# EAGLE board ubraidsII (EAGLE 7.5.0)
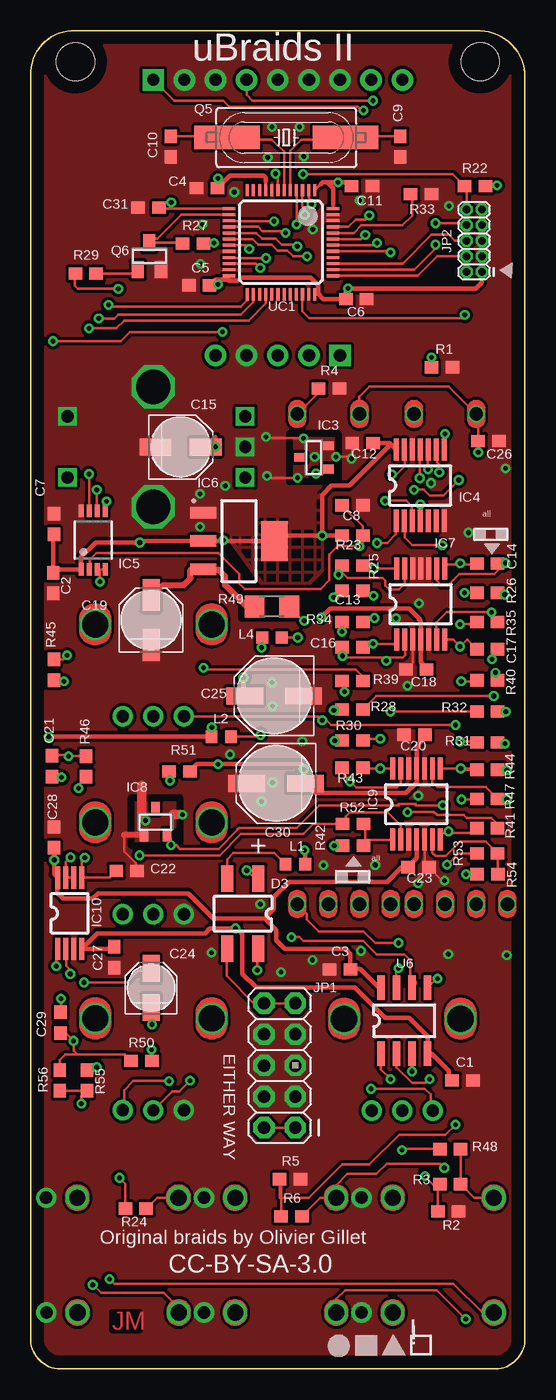
[diagram p0: board, top side]
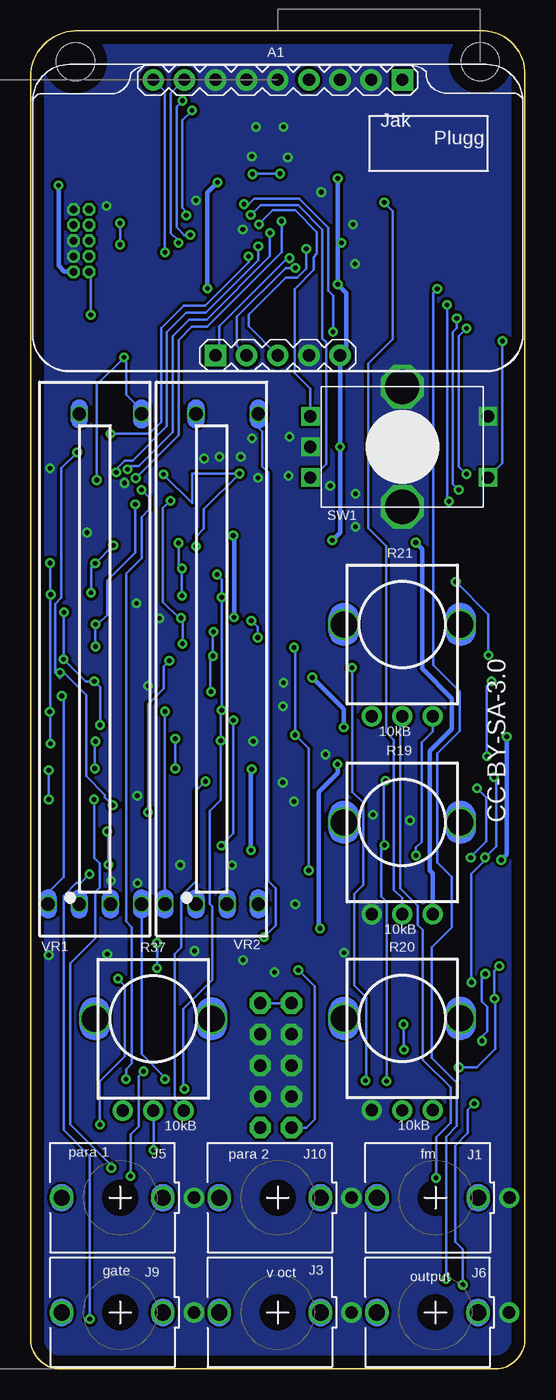
[diagram p1: board, bottom side, seen from below]

Size 40.32 x 109.22 mm. Coordinates in mm from the lower left corner, seen from the top.
Outline: 0,2.54 arc91 2.38,0 37.94,0 arc91 40.32,2.54 40.32,105.41 arc88 36.67,109.22 3.65,109.22 arc94 0,105.57 0,2.54
Copper layers (1*16): Top 0.035mm / dielectric 1.5mm / Bottom 0.035mm
Design rules "default *": minimum track width 10mil, minimum drill 0.61mm, track to track 8mil, track to pad 8mil, pad to pad 8mil, via to via 8mil, smd to smd 8mil, copper to edge 40mil, drill to drill 8mil, minimum pad ring 0mil, minimum via ring 8mil, stop-mask expansion 4mil, vias tented up to drill 15mil, thermal gap 10mil
Net classes: 0 default: width 0.203 mm, drill 0.3 mm, clearance 0.152 mm, clearance 0.152 mm to class 1, clearance 0.152 mm to class 2; 1 hipriority: width 0.203 mm, drill 0.3 mm, clearance 0.152 mm, clearance 0.152 mm to class 0, clearance 0.152 mm to class 2; 2 powa: width 0.381 mm, drill 0.3 mm, clearance 0.152 mm, clearance 0.152 mm to class 0, clearance 0.152 mm to class 1
Holes 3.1 mm at 3.65,106.68 36.67,106.68

## Footprints (pad centres in the part's own frame; a part is rotated, then mirrored left to right if it is on the bottom)
DISPLAY-MODULE = drill 1 pad 1.75 square: 1 14.92,1.25; 6 30.16,23.75 | drill 1 pad 1.75: 2 17.46,1.25; 3 20,1.25; 4 22.54,1.25; 5 25.08,1.25; 7 27.62,23.75; 8 25.08,23.75; 9 22.54,23.75; 10 20,23.75; 11 17.46,23.75; 12 14.92,23.75; 13 12.38,23.75; 14 9.84,23.75
CAP_0603 = smd 1.1 x 1: 1 -0.85,0; 2 0.85,0
CAP_0603_C2 = smd 1.1 x 1: 1 -0.85,0; 2 0.85,0
CAP_0603_C3 = smd 1.1 x 1: 1 -0.85,0; 2 0.85,0
CAP_0603_C4 = smd 1.1 x 1: 1 -0.85,0; 2 0.85,0
CAP_0603_C5 = smd 1.1 x 1: 1 -0.85,0; 2 0.85,0
CAP_0603_C6 = smd 1.1 x 1: 1 -0.85,0; 2 0.85,0
CAP_0603_C7 = smd 1.1 x 1: 1 -0.85,0; 2 0.85,0
CAP_0603_C8 = smd 1.1 x 1: 1 -0.85,0; 2 0.85,0
CAP_0603_C9 = smd 1.1 x 1: 1 -0.85,0; 2 0.85,0
CAP_0603_C10 = smd 1.1 x 1: 1 -0.85,0; 2 0.85,0
CAP_0603_C11 = smd 1.1 x 1: 1 -0.85,0; 2 0.85,0
CAP_0603_C12 = smd 1.1 x 1: 1 -0.85,0; 2 0.85,0
CAP_0603_C13 = smd 1.1 x 1: 1 -0.85,0; 2 0.85,0
CAP_0603_C14 = smd 1.1 x 1: 1 -0.85,0; 2 0.85,0
PANASONIC_C = smd 2.6 x 1.4: + 2.05,0; - -2.05,0
CAP_0603_C16 = smd 1.1 x 1: 1 -0.85,0; 2 0.85,0
CAP_0603_C17 = smd 1.1 x 1: 1 -0.85,0; 2 0.85,0
CAP_0603_C18 = smd 1.1 x 1: 1 -0.85,0; 2 0.85,0
PANASONIC_C_C19 = smd 2.6 x 1.4: + 2.05,0; - -2.05,0
CAP_0603_C20 = smd 1.1 x 1: 1 -0.85,0; 2 0.85,0
CAP_0603_C21 = smd 1.1 x 1: 1 -0.85,0; 2 0.85,0
CAP_0603_C22 = smd 1.1 x 1: 1 -0.85,0; 2 0.85,0
CAP_0603_C23 = smd 1.1 x 1: 1 -0.85,0; 2 0.85,0
PANASONIC_B = smd 2.2 x 1.4: + 1.6,0; - -1.6,0
PANASONIC_D = smd 3 x 1.4: + 2.4,0; - -2.4,0
CAP_0603_C26 = smd 1.1 x 1: 1 -0.85,0; 2 0.85,0
CAP_0603_C27 = smd 1.1 x 1: 1 -0.85,0; 2 0.85,0
CAP_0603_C28 = smd 1.1 x 1: 1 -0.85,0; 2 0.85,0
CAP_0603_C29 = smd 1.1 x 1: 1 -0.85,0; 2 0.85,0
PANASONIC_D_C30 = smd 3 x 1.4: + 2.4,0; - -2.4,0
CAP_0603_C31 = smd 1.1 x 1: 1 -0.85,0; 2 0.85,0
SOP-4/6.5x2.54 = smd 2.2 x 1: 1 -2.855,1.27; 2 -2.855,-1.27; 3 2.855,-1.27; 4 2.855,1.27
DBZ_R-PDSO-G3 = smd 0.7 x 1: 1 -0.95,-1.1; 2 0.95,-1.1; 3 0,1.1
TSSOP-14 = smd 1.8 x 0.4: 1 -2.9,1.95; 2 -2.9,1.3; 3 -2.9,0.65; 4 -2.9,0; 5 -2.9,-0.65; 6 -2.9,-1.3; 7 -2.9,-1.95; 8 2.9,-1.95; 9 2.9,-1.3; 10 2.9,-0.65; 11 2.9,0; 12 2.9,0.65; 13 2.9,1.3; 14 2.9,1.95
MSOP-8 = smd 0.41 x 1.02: 1 -0.975,-2.4; 2 -0.325,-2.4; 3 0.325,-2.4; 4 0.975,-2.4; 5 0.975,2.4; 6 0.325,2.4; 7 -0.325,2.4; 8 -0.975,2.4
SOT223-4 = smd 2.15 x 0.95: 1 -2.9,2.3; 2 -2.9,0; 3 -2.9,-2.3 | smd 2.15 x 3.25: 4 2.9,0
TSSOP-14_IC7 = smd 1.8 x 0.4: 1 -2.9,1.95; 2 -2.9,1.3; 3 -2.9,0.65; 4 -2.9,0; 5 -2.9,-0.65; 6 -2.9,-1.3; 7 -2.9,-1.95; 8 2.9,-1.95; 9 2.9,-1.3; 10 2.9,-0.65; 11 2.9,0; 12 2.9,0.65; 13 2.9,1.3; 14 2.9,1.95
DBZ_R-PDSO-G3_IC8 = smd 0.7 x 1: 1 -0.95,-1.1; 2 0.95,-1.1; 3 0,1.1
TSSOP-14_IC9 = smd 1.8 x 0.4: 1 -2.9,1.95; 2 -2.9,1.3; 3 -2.9,0.65; 4 -2.9,0; 5 -2.9,-0.65; 6 -2.9,-1.3; 7 -2.9,-1.95; 8 2.9,-1.95; 9 2.9,-1.3; 10 2.9,-0.65; 11 2.9,0; 12 2.9,0.65; 13 2.9,1.3; 14 2.9,1.95
TSSOP-8 = smd 1.8 x 0.4: 1 -2.9,0.975; 2 -2.9,0.325; 3 -2.9,-0.325; 4 -2.9,-0.975; 5 2.9,-0.975; 6 2.9,-0.325; 7 2.9,0.325; 8 2.9,0.975
Thonkiconn_Jack = drill 1.321 pad 1.905: 1 0,3.48; 2 0,-4.775 | drill 1.016 pad 1.651: 3 0,6.02
Thonkiconn_Jack_J3 = drill 1.321 pad 1.905: 1 0,3.48; 2 0,-4.775 | drill 1.016 pad 1.651: 3 0,6.02
Thonkiconn_Jack_J5 = drill 1.321 pad 1.905: 1 0,3.48; 2 0,-4.775 | drill 1.016 pad 1.651: 3 0,6.02
Thonkiconn_Jack_J6 = drill 1.321 pad 1.905: 1 0,3.48; 2 0,-4.775 | drill 1.016 pad 1.651: 3 0,6.02
Thonkiconn_Jack_J9 = drill 1.321 pad 1.905: 1 0,3.48; 2 0,-4.775 | drill 1.016 pad 1.651: 3 0,6.02
Thonkiconn_Jack_J10 = drill 1.321 pad 1.905: 1 0,3.48; 2 0,-4.775 | drill 1.016 pad 1.651: 3 0,6.02
AVR_ICSP = drill 1.016 pad 1.737 octagon: 1 -1.27,5.08; 2 1.27,5.08; 3 -1.27,2.54; 4 1.27,2.54; 5 -1.27,0; 6 1.27,0; 7 -1.27,-2.54; 8 1.27,-2.54; 9 -1.27,-5.08; 10 1.27,-5.08
2X5-1.27 = drill 0.61 pad 1.033 octagon: 1 -1.27,3.81; 2 0,3.81; 3 -1.27,2.54; 4 0,2.54; 5 -1.27,1.27; 6 0,1.27; 7 -1.27,0; 8 0,0; 9 -1.27,-1.27; 10 0,-1.27
IND_0603 = smd 0.95 x 1: 1 -0.8,0; 2 0.8,0
IND_0603_L2 = smd 0.95 x 1: 1 -0.8,0; 2 0.8,0
IND_0603_L4 = smd 0.95 x 1: 1 -0.8,0; 2 0.8,0
HC49UP = smd 5.334 x 1.93: 1 -4.826,0; 2 4.826,0
SOT23-BEC = smd 1 x 1.4: B -0.95,-1.1; C 0,1.1; E 0.95,-1.1
RES_0603 = smd 1.1 x 1: 1 -0.85,0; 2 0.85,0
RES_0603_R2 = smd 1.1 x 1: 1 -0.85,0; 2 0.85,0
RES_0603_R3 = smd 1.1 x 1: 1 -0.85,0; 2 0.85,0
RES_0603_R4 = smd 1.1 x 1: 1 -0.85,0; 2 0.85,0
RES_0603_R5 = smd 1.1 x 1: 1 -0.85,0; 2 0.85,0
RES_0603_R6 = smd 1.1 x 1: 1 -0.85,0; 2 0.85,0
9mm_Alpha/Bourns_Pot = drill 1 pad 1.651: 1 -2.489,-7.493; 2 0,-7.5; 3 2.489,-7.493 | drill 2.134 pad 2.54: 4 -4.75,0; 5 4.75,0
9mm_Alpha/Bourns_Pot_R20 = drill 1 pad 1.651: 1 -2.489,-7.493; 2 0,-7.5; 3 2.489,-7.493 | drill 2.134 pad 2.54: 4 -4.75,0; 5 4.75,0
9mm_Alpha/Bourns_Pot_R21 = drill 1 pad 1.651: 1 -2.489,-7.493; 2 0,-7.5; 3 2.489,-7.493 | drill 2.134 pad 2.54: 4 -4.75,0; 5 4.75,0
RES_0603_R22 = smd 1.1 x 1: 1 -0.85,0; 2 0.85,0
RES_0603_R23 = smd 1.1 x 1: 1 -0.85,0; 2 0.85,0
RES_0603_R24 = smd 1.1 x 1: 1 -0.85,0; 2 0.85,0
RES_0603_R25 = smd 1.1 x 1: 1 -0.85,0; 2 0.85,0
RES_0603_R26 = smd 1.1 x 1: 1 -0.85,0; 2 0.85,0
RES_0603_R27 = smd 1.1 x 1: 1 -0.85,0; 2 0.85,0
RES_0603_R28 = smd 1.1 x 1: 1 -0.85,0; 2 0.85,0
RES_0603_R29 = smd 1.1 x 1: 1 -0.85,0; 2 0.85,0
RES_0603_R30 = smd 1.1 x 1: 1 -0.85,0; 2 0.85,0
RES_0603_R31 = smd 1.1 x 1: 1 -0.85,0; 2 0.85,0
RES_0603_R32 = smd 1.1 x 1: 1 -0.85,0; 2 0.85,0
RES_0603_R33 = smd 1.1 x 1: 1 -0.85,0; 2 0.85,0
RES_0603_R34 = smd 1.1 x 1: 1 -0.85,0; 2 0.85,0
RES_0603_R35 = smd 1.1 x 1: 1 -0.85,0; 2 0.85,0
9mm_Alpha/Bourns_Pot_R37 = drill 1 pad 1.651: 1 -2.489,-7.493; 2 0,-7.5; 3 2.489,-7.493 | drill 2.134 pad 2.54: 4 -4.75,0; 5 4.75,0
RES_0603_R39 = smd 1.1 x 1: 1 -0.85,0; 2 0.85,0
RES_0603_R40 = smd 1.1 x 1: 1 -0.85,0; 2 0.85,0
RES_0603_R41 = smd 1.1 x 1: 1 -0.85,0; 2 0.85,0
RES_0603_R42 = smd 1.1 x 1: 1 -0.85,0; 2 0.85,0
RES_0603_R43 = smd 1.1 x 1: 1 -0.85,0; 2 0.85,0
RES_0603_R44 = smd 1.1 x 1: 1 -0.85,0; 2 0.85,0
RES_0603_R45 = smd 1.1 x 1: 1 -0.85,0; 2 0.85,0
RES_0603_R46 = smd 1.1 x 1: 1 -0.85,0; 2 0.85,0
RES_0603_R47 = smd 1.1 x 1: 1 -0.85,0; 2 0.85,0
RES_0603_R48 = smd 1.1 x 1: 1 -0.85,0; 2 0.85,0
R1206 = smd 1.6 x 1.803: 1 -1.422,0; 2 1.422,0
RES_0603_R50 = smd 1.1 x 1: 1 -0.85,0; 2 0.85,0
RES_0603_R51 = smd 1.1 x 1: 1 -0.85,0; 2 0.85,0
RES_0603_R52 = smd 1.1 x 1: 1 -0.85,0; 2 0.85,0
RES_0603_R53 = smd 1.1 x 1: 1 -0.85,0; 2 0.85,0
RES_0603_R54 = smd 1.1 x 1: 1 -0.85,0; 2 0.85,0
RES_0603_R55 = smd 1.1 x 1: 1 -0.85,0; 2 0.85,0
RES_0603_R56 = smd 1.1 x 1: 1 -0.85,0; 2 0.85,0
ALPS_EC12E_SW = drill 1 pad 1.508 square: A -2.5,-7.5; B 2.5,-7.5; C 0,-7.5; D -2.5,7; E 2.5,7 | drill 2.8 pad 3.526 octagon: GND1 -4.9,0; GND2 4.9,0
SOIC-8/150mil = smd 2 x 0.6: 1 -2.7,1.905; 2 -2.7,0.635; 3 -2.7,-0.635; 4 -2.7,-1.905; 5 2.7,-1.905; 6 2.7,-0.635; 7 2.7,0.635; 8 2.7,1.905
LQFP48 = smd 0.254 x 1: 1 -2.75,-4.25; 2 -2.25,-4.25; 3 -1.75,-4.25; 4 -1.25,-4.25; 5 -0.75,-4.25; 6 -0.25,-4.25; 7 0.25,-4.25; 8 0.75,-4.25; 9 1.25,-4.25; 10 1.75,-4.25; 11 2.25,-4.25; 12 2.75,-4.25; 25 2.75,4.25; 26 2.25,4.25; 27 1.75,4.25; 28 1.25,4.25; 29 0.75,4.25; 30 0.25,4.25; 31 -0.25,4.25; 32 -0.75,4.25; 33 -1.25,4.25; 34 -1.75,4.25; 35 -2.25,4.25; 36 -2.75,4.25 | smd 1 x 0.254: 13 4.25,-2.75; 14 4.25,-2.25; 15 4.25,-1.75; 16 4.25,-1.25; 17 4.25,-0.75; 18 4.25,-0.25; 19 4.25,0.25; 20 4.25,0.75; 21 4.25,1.25; 22 4.25,1.75; 23 4.25,2.25; 24 4.25,2.75; 37 -4.25,2.75; 38 -4.25,2.25; 39 -4.25,1.75; 40 -4.25,1.25; 41 -4.25,0.75; 42 -4.25,0.25; 43 -4.25,-0.25; 44 -4.25,-0.75; 45 -4.25,-1.25; 46 -4.25,-1.75; 47 -4.25,-2.25; 48 -4.25,-2.75
BOURNS_PTL_30mm = drill 1.092 pad 1.397: 1 -20,1.27; 2 -20,3.81; 3 20,1.27; 4 -20,-1.27; 5 20,-3.81; 6 -20,-3.81
BOURNS_PTL_30mm_VR2 = drill 1.092 pad 1.397: 1 -20,1.27; 2 -20,3.81; 3 20,1.27; 4 -20,-1.27; 5 20,-3.81; 6 -20,-3.81

## Placement (x,y rotation side)
A1  DISPLAY-MODULE  [DISPLAY-MODULE]  40.16,81.46 0 bottom
C1  100n  [CAP_0603]  35.24,23.55 0 top
C2  100n  [CAP_0603_C2]  1.85,64.14 270 top
C3  100n  [CAP_0603_C3]  25.24,32.6 0 top
C4  100n  [CAP_0603_C4]  14.39,96.36 180 top
C5  100n  [CAP_0603_C5]  13.75,88.42 180 top
C6  1u  [CAP_0603_C6]  26.57,87.31 0 top
C7  100n  [CAP_0603_C7]  1.9,68.95 90 top
C8  470n  [CAP_0603_C8]  26.25,70.48 0 top
C9  18p  [CAP_0603_C9]  30.16,99.75 90 top
C10  18p  [CAP_0603_C10]  11.43,99.75 90 top
C11  100n  [CAP_0603_C11]  27.04,96.52 0 top
C12  1u  [CAP_0603_C12]  27.09,75.56 180 top
C13  1n  [CAP_0603_C13]  26.26,63.5 0 top
C14  1n  [CAP_0603_C14]  37.25,65.72 180 top
C15  22u  [PANASONIC_C]  12.24,75.24 0 top
C16  1n  [CAP_0603_C16]  26.26,58.9 0 top
C17  1n  [CAP_0603_C17]  37.25,58.74 180 top
C18  100n  [CAP_0603_C18]  31.47,57.07 180 top
C19  22u  [PANASONIC_C_C19]  9.83,61.12 90 top
C20  100n  [CAP_0603_C20]  31.3,51.75 0 top
C21  100p  [CAP_0603_C21]  1.74,49.18 270 top
C22  100p  [CAP_0603_C22]  7.83,40.64 0 top
C23  100n  [CAP_0603_C23]  31.64,40.95 0 top
C24  10u  [PANASONIC_B]  9.83,31.08 90 top
C25  47u  [PANASONIC_D]  19.86,54.93 180 top
C26  100n  [CAP_0603_C26]  37.36,75.72 0 top
C27  100n  [CAP_0603_C27]  6.83,33.6 90 top
C28  100n  [CAP_0603_C28]  1.9,43.38 90 top
C29  47p  [CAP_0603_C29]  2.44,28.26 90 top
C30  47u  [PANASONIC_D_C30]  20.02,47.78 180 top
C31  100n  [CAP_0603_C31]  9.63,94.77 180 top
D3  [SOP-4/6.5x2.54]  17.3,37.15 270 top
IC3  LM4040B25  [DBZ_R-PDSO-G3]  23.11,74.38 90 top
IC4  MCP3204  [TSSOP-14]  31.79,72.12 90 top
IC5  DAC8551  [MSOP-8]  5.1,67.65 0 top
IC6  LM1117-3.3  [SOT223-4]  16.98,67.57 0 top
IC7  MCP6004  [TSSOP-14_IC7]  31.82,62.42 90 top
IC8  LM4040B10  [DBZ_R-PDSO-G3_IC8]  10.19,44.66 0 top
IC9  TL074D  [TSSOP-14_IC9]  31.48,46.1 90 top
IC10  TL072  [TSSOP-8]  3.2,37.19 90 top
J1  fm  [Thonkiconn_Jack]  7.29,13.97 270 bottom
J3  v oct  [Thonkiconn_Jack_J3]  20.16,4.6 270 bottom
J5  para 1  [Thonkiconn_Jack_J5]  33.02,13.97 270 bottom
J6  output  [Thonkiconn_Jack_J6]  7.3,4.6 270 bottom
J9  gate  [Thonkiconn_Jack_J9]  33.02,4.6 270 bottom
J10  para 2  [Thonkiconn_Jack_J10]  20.16,13.97 270 bottom
JP1  M05X2PTH  [AVR_ICSP]  20.32,24.77 180 top
JP2  M05X2MINIJTAG  [2X5-1.27]  35.56,93.34 180 top
L1  [IND_0603]  21.6,41.19 180 top
L2  [IND_0603_L2]  15.55,51.59 0 top
L4  [IND_0603_L4]  19.69,59.69 0 top
Q5  8MHz  [HC49UP]  20.86,100.49 0 top
Q6  MMBT3904  [SOT23-BEC]  9.69,90.82 0 top
R1  1.2k  [RES_0603]  33.55,81.75 0 top
R2  1.0M  [RES_0603_R2]  34.07,12.86 180 top
R3  1.0M  [RES_0603_R3]  34.23,15.08 180 top
R4  1.2k  [RES_0603_R4]  24.34,80 0 top
R5  1.0M  [RES_0603_R5]  21.17,15.48 180 top
R6  1.0M  [RES_0603_R6]  21.28,12.46 180 top
R19  10kB  [9mm_Alpha/Bourns_Pot]  10.01,44.6 0 bottom
R20  10kB  [9mm_Alpha/Bourns_Pot_R20]  10.01,28.61 0 bottom
R21  10kB  [9mm_Alpha/Bourns_Pot_R21]  10.01,60.76 0 bottom
R22  10k  [RES_0603_R22]  36.25,96.52 0 top
R23  1.0k  [RES_0603_R23]  26.26,68 0 top
R24  100k  [RES_0603_R24]  8.57,13.07 180 top
R25  49.9k  [RES_0603_R25]  26.26,65.56 0 top
R26  49.9k  [RES_0603_R26]  37.25,63.34 180 top
R27  10k  [RES_0603_R27]  13.24,91.84 0 top
R28  200k  [RES_0603_R28]  26.26,53.82 180 top
R29  100k  [RES_0603_R29]  4.5,89.38 0 top
R30  24.9k  [RES_0603_R30]  26.26,51.28 180 top
R31  24.9k  [RES_0603_R31]  37.25,51.12 0 top
R32  200k  [RES_0603_R32]  37.25,53.66 0 top
R33  10k  [RES_0603_R33]  31.85,95.87 180 top
R34  24.9k  [RES_0603_R34]  26.26,60.96 0 top
R35  24.9k  [RES_0603_R35]  37.25,60.96 180 top
R37  10kB  [9mm_Alpha/Bourns_Pot_R37]  30.32,28.57 0 bottom
R39  120k  [RES_0603_R39]  26.26,56.14 180 top
R40  200k  [RES_0603_R40]  37.25,56.2 180 top
R41  24.9k  [RES_0603_R41]  37.25,44.13 0 top
R42  24.9k  [RES_0603_R42]  26.3,42.7 180 top
R43  24.9k  [RES_0603_R43]  26.26,49.05 0 top
R44  24.9k  [RES_0603_R44]  37.25,48.9 180 top
R45  39k  [RES_0603_R45]  1.9,57.05 90 top
R46  39k  [RES_0603_R46]  4.53,49.16 90 top
R47  100k  [RES_0603_R47]  37.25,46.51 0 top
R48  100k  [RES_0603_R48]  34.23,17.94 180 top
R49  4.7  [R1206]  19.68,62.23 0 top
R50  24.9k  [RES_0603_R50]  9.05,25.14 0 top
R51  330  [RES_0603_R51]  12.14,48.77 180 top
R52  24.9k  [RES_0603_R52]  26.29,44.48 0 top
R53  24.9k  [RES_0603_R53]  37.25,42.07 180 top
R54  100k  [RES_0603_R54]  37.27,40.38 0 top
R55  1.0k  [RES_0603_R55]  4.6,23.55 90 top
R56  100k  [RES_0603_R56]  2.38,23.55 90 top
SW1  EC12E_SW  [ALPS_EC12E_SW]  10,75.25 270 bottom
U6  [SOIC-8/150mil]  30.48,28.42 90 top
UC1  STM32F103CBT6  [LQFP48]  20.43,91.95 180 top
VR1  para 1  [BOURNS_PTL_30mm]  35.08,57.94 90 bottom
VR2  10k  [BOURNS_PTL_30mm_VR2]  25.56,57.94 90 bottom

## Library data of the parts
A1 C1-C31 D3 IC3-IC10 J1 J3 J5 J6 J9 J10 JP1 JP2 Q5 Q6 R1-R6 R22-R35 R39-R56 SW1 UC1 = common
L1 L4 = common; DATASHEET: http://datasheets.diptrace.com/inductors/BR_series.pdf; MANUFACTURER: Taiyo Yuden
L2 = common; DATASHEET: https://ca.mouser.com/datasheet/2/400/eads_automotive_signal_kmz1608-hr_en-1108686.pdf; MANUFACTURER: TDK
R19 = common; VALUE: FINE
R20 = common; VALUE: COARSE
R21 = common; VALUE: FM
R37 = common; VALUE: MODULATION
U6 = common; DATASHEET: http://www.ti.com/lit/gpn/tl084
VR1 VR2 = common; DATASHEET: http://www.bourns.com/data/global/pdfs/bourns_trimpot_catalog.pdf; MANUFACTURER: Bourns

## Nets
+3V3 [powa]: A1.5 C2.1 C4.1 C5.1 C6.1 C7.1 C11.1 C12.1 C15.+ C18.1 IC4.14 IC5.1 IC6.2 IC6.4 IC7.4 JP2.1 R19.3 R22.2 R23.1 R27.2 UC1.1 UC1.9 UC1.24 UC1.36 UC1.48
ADC_MISO: IC4.10 UC1.16
ADC_MOSI: IC4.9 UC1.17
ADC_SCK: IC4.11 UC1.15
ADC_SS: IC4.8 UC1.18
AREF: C8.1 IC3.1 IC4.13 IC5.2 R23.2
AREF_-10: C26.1 IC8.2 R20.3 R40.1 R51.2 VR1.3 VR2.3
AUDIO_OUT: IC5.3 IC5.4 R45.2
BOOT_FLASH: R33.2 UC1.44
DAC_MOSI: IC5.7 UC1.28
DAC_SCK: IC5.6 UC1.26
DAC_SS: IC5.5 UC1.25
DISP_CHAR0: A1.9 UC1.43
DISP_CHAR1: A1.6 UC1.45
DISP_CHAR2: A1.14 UC1.41
DISP_CHAR3: A1.13 UC1.42
DISP_EN: A1.1 UC1.21
DISP_SCK: A1.2 UC1.22
DISP_SER: A1.3 UC1.19
ENC_A: SW1.B UC1.3
ENC_B: SW1.A UC1.4
ENC_CLICK: SW1.E UC1.2
FINE_TUNE: C31.1 R19.2 UC1.13
FM_CV: C17.2 IC4.4 IC7.7 R35.2
GATE: Q6.C R27.1 UC1.14
GND: A1.4 A1.7 A1.8 A1.10 A1.11 A1.12 C1.2 C2.2 C3.1 C4.2 C5.2 C6.2 C7.2 C8.2 C9.1 C10.1 C11.2 C12.2 C15.- C18.2 C19.- C20.1 C22.2 C23.2 C25.- C26.2 C27.1 C28.2 C30.+ C31.2 IC3.2 IC4.7 IC4.12 IC5.8 IC6.1 IC7.3 IC7.5 IC7.10 IC7.11 IC7.12 IC8.1 IC9.3 IC9.5 IC9.10 IC9.12 IC10.3 J1.3 J3.3 J5.3 J6.3 J9.3 J10.3 JP1.3 JP1.4 JP1.5 JP1.6 JP1.7 JP1.8 JP2.3 JP2.5 JP2.9 Q6.E R1.2 R2.1 R4.2 R5.1 R19.1 R19.4 R19.5 R20.1 R20.4 R20.5 R21.4 R21.5 R33.1 R37.4 R37.5 SW1.C SW1.D SW1.GND1 SW1.GND2 UC1.8 UC1.20 UC1.23 UC1.35 UC1.46 UC1.47 VR1.1 VR2.1
JTCK: JP2.4 UC1.37
JTDI: JP2.8 UC1.38
JTDO: JP2.6 UC1.39
JTMS: JP2.2 UC1.34
N$1: R2.2 R3.2 U6.3
N$7: C9.2 Q5.2 UC1.5
N$8: C10.2 Q5.1 UC1.6
N$12: IC9.7 R41.1 R53.2
N$13: R20.2 R39.1
N$19: R1.1 U6.2 VR1.5
N$29: C16.1 IC7.2 R34.1 R39.2 R41.2
N$45: IC9.6 R53.1 R54.2
N$48: R21.2 R24.2
N$49: C19.+ IC6.3 R49.1
N$50: IC9.13 R37.3 R43.1
N$51: IC9.14 R30.1 R43.2
N$52: IC9.2 R21.3 R52.1
N$53: IC9.1 R42.1 R52.2
N$55: C17.1 IC7.6 R21.1 R35.1 R40.2 R42.2
N$56: D3.4 JP1.1 JP1.2
N$58: IC9.8 R31.1 R44.2
N$59: C13.1 IC7.13 R25.1 R28.2 R30.2 R37.1
N$61: R28.1 VR1.2
N$62: R37.2 R48.2
N$63: IC9.9 R44.1 R47.2
N$64: D3.3 JP1.9 JP1.10
N$65: R32.1 VR2.2
N$66: Q6.B R29.2
N$67: C21.2 C24.+ IC10.6 IC10.7
N$68: C24.- R50.2
N$69: C22.1 IC10.5 R46.1
N$70 [hipriority]: C14.1 IC7.9 R26.1 R31.2 R32.2
N$71: C21.1 R45.1 R46.2
N$72: J6.2 R55.1 R56.1
N$73: C29.2 IC10.1 R55.2
N$75: C29.1 IC10.2 R50.1 R56.2
Net_0: J9.2 R29.1
Net_1: J3.2 R54.1
Net_2: J5.2 R3.1 R48.1
Net_3: U6.7 VR2.6
Net_12: U6.1 VR1.6
Net_42: J1.2 R24.1
Net_55: J10.2 R6.1 R47.1
Net_80: R4.1 U6.6 VR2.5
Net_81: R5.2 R6.2 U6.5
Net_106: D3.1 L2.2 L4.1
Net_107: D3.2 L1.2
Net_110: L4.2 R49.2
PARAM1_CV: C13.2 IC4.1 IC7.14 R25.2
PARAM2_CV: C14.2 IC4.2 IC7.8 R26.2
PITCH_CV: C16.2 IC4.3 IC7.1 R34.2
RESET: JP2.10 R22.1 UC1.7
VCC [powa]: C3.2 C23.1 C25.+ C28.1 IC9.4 IC10.8 L2.1 U6.8
VEE [powa]: C1.1 C20.2 C27.2 C30.- IC9.11 IC10.4 L1.1 R51.1 U6.4

## Tracks (layer width: path | path; a pad name or v marks a point on that pad's centre or on a via)
+3V3  (via drill 0.38 pad 0.76)
  Top 0.254: 23.5,87.7 23.45,87.7 | 23.45,87.7 | 23.45,87.7 UC1.36 | UC1.24 16.18,88.89 16.18,88.82 | UC1.1 23.67,96.69 | UC1.48 24.68,95.02 | UC1.9 19.18,96.89
  Top 0.381: 23.5,87.7 23.89,87.31 C6.1 25.72,88 v25.89,88.17 36.31,88.17 36.79,88.66 36.79,89.5 JP2.1 | 16.18,88.89 15.07,88.89 14.98,88.8 | 14.98,88.8 | 14.98,88.8 C5.1 | 23.67,96.69 | 23.67,96.69 23.81,96.84 24.2,96.84 | 24.2,96.84 v25.06,96.84 25.88,96.84 C11.1 | 24.68,95.02 | 24.68,95.02 24.68,96.36 24.2,96.84 | v15.27,88.5 14.98,88.8 | v15.27,97.15 15.27,96.39 C4.1 16.26,97.38 19.01,97.38 19.18,97.21 19.18,96.89 | 16.18,88.82 16.94,88.82 17.17,89.04 22.85,89.04 23.45,88.43 23.45,87.7 | 19.18,96.89 | v38.05,96.59 37.17,96.59 R22.2 | C18.1 32.39,57 32.5,57 31.82,57.69 IC7.4 31.82,61.03 31.68,61.18 31.78,61.18 30.89,62.07 24.44,62.07 v23.72,61.35 | R27.2 14.09,91.91 v14.97,91.91 | C7.1 1.85,68.05 C2.1 2.11,65.25 IC5.1 4.11,65.27 4.11,66.24 5.31,67.44 v8.91,67.44 9.03,67.57 IC6.2 15.72,67.57 | C12.1 29.3,75.56 29.39,75.47 | 29.39,75.47 IC4.14 | R23.1 v23.79,68 | v23.79,68 20.32,68 IC6.4 15.72,67.57 | v15.72,67.62 15.72,67.57 | v15.08,75.26 15.08,76.03 C15.+ | v23.79,68 23.79,71.32 24.54,72.07 25.98,72.07 29.39,75.47
  Bottom 0.381: 15.27,91.61 v15.27,88.5 14.58,87.81 14.58,82.71 A1.5 v15.08,75.26 15.08,68.26 v15.72,67.62 | 15.27,91.61 v15.27,97.15 | v25.89,88.17 25.89,96.01 v25.06,96.84 | JP2.1 37.56,89.53 38.05,90.02 v38.05,96.59 | v14.97,91.91 15.27,91.61 | R19.3 7.52,40.44 7.78,40.7 7.78,50.42 5.95,52.24 5.95,54.72 8.38,57.15 8.38,66.92 v8.91,67.44 | v23.79,68 23.72,68 v23.72,61.35
  pour Top (isolate 0.254, hatched): 18.8,64.1 22.81,64.1 23.84,65.13 23.84,71.3 16.32,71.3 16.32,67.5
ADC_MISO  (via drill 0.38 pad 0.76)
  Top 0.203: UC1.16 18.56,93.2 18.89,92.87 20.64,92.87 v20.8,92.71 | v32.41,73.42 32.41,75.05 IC4.10
  Bottom 0.203: v20.8,92.71 20.8,90.81 25.97,85.64 27.4,85.64 28.73,84.3 28.73,76.45 31.52,73.66 32.17,73.66 v32.41,73.42
ADC_MOSI  (via drill 0.38 pad 0.76)
  Top 0.203: UC1.17 18.42,92.7 18.89,92.23 20,92.23 20.48,91.76 21.59,91.76 v21.75,91.6 | v33.34,73.18 33.34,73.82 33.18,73.98 33.18,75.02 IC4.9
  Bottom 0.203: v21.75,91.6 21.75,90.49 26.05,86.19 27.64,86.19 29.21,84.61 29.21,76.92 32,74.14 32.63,74.14 33.34,73.43 v33.34,73.18
ADC_SCK  (via drill 0.38 pad 0.76)
  Top 0.203: UC1.15 16.18,93.66 v19.84,93.66 | v31.75,72.7 31.75,74.97 IC4.11
  Bottom 0.203: v19.84,93.66 19.84,91.12 25.91,85.06 27.18,85.06 28.26,83.98 28.26,76.19 v31.75,72.7
ADC_SS  (via drill 0.38 pad 0.76)
  Top 0.203: UC1.18 18.13,92.2 18.57,91.76 19.69,91.76 20.16,91.28 20.96,91.28 21.43,90.81 v22.54,90.81 | v33.8,76.31 33.8,75.07 IC4.8
  Bottom 0.203: v22.54,90.81 22.54,90.33 26.08,86.79 27.83,86.79 29.69,84.93 29.69,77.25 30.63,76.31 v33.8,76.31
AREF  (via drill 0.38 pad 0.76)
  Top 0.203: C8.1 27.11,68.77 R23.2 27.11,67.42 v26.83,67.14 25.06,67.14 24.37,66.45 24.37,64.37 23.65,63.65 17.46,63.65 17,64.11 17,64.86 15.29,66.57 5.34,66.57 4.82,66.05 4.82,65.29 IC5.2 | v23.28,73.07 23.85,73.07 IC3.1 | v29.49,73 29.84,73 30.54,73.69 30.54,74.97 IC4.13
  Bottom 0.203: v26.83,67.14 26.83,67.94 26.19,68.57 26.19,70.16 v23.28,73.07 27.15,73.07 27.15,70.65 v29.49,73
AREF_-10  (via drill 0.38 pad 0.76)
  Top 0.203: R40.1 38.1,56.99 v37.94,56.83 | v36.52,74.8 C26.1 36.51,77.78 VR1.3 34.13,80.16 27.62,80.16 26.83,79.37 VR2.3 | v33.62,46 31.42,46 31.42,46.09 30.04,46.09 30.04,46 23.57,46 21.72,44.16 17.02,44.16 16.87,44.01 16.87,43.97 15.35,42.44 12.18,42.44 11.87,42.75 v11.44,42.75 11.44,43.26 IC8.2 | v11.36,48 11.36,48.69 R51.2 | v11.29,23.5 8.39,23.5 7.62,22.73 7.62,21.21 R20.3
  Bottom 0.203: v36.52,74.8 37.81,73.51 37.81,62.93 38.33,62.41 38.33,56.79 37.94,56.4 v37.94,56.83 37.62,56.83 35.79,55 35.79,48.38 34.26,46.84 34.26,46.64 v33.62,46 | v11.36,48 11.5,48.14 11.5,42.75 v11.44,42.75 11.73,42.75 11.73,38.55 11.29,38.11 v11.29,23.5
AUDIO_OUT  (via drill 0.38 pad 0.76)
  Top 0.203: IC5.3 5.65,65.25 | 5.65,65.25 IC5.4 | R45.2 2.64,57.9 v2.98,58.23 | v5.65,64.24 5.65,65.25
  Bottom 0.203: v2.98,58.23 2.98,61.57 v5.65,64.24
BOOT_FLASH
  Top 0.203: UC1.44 26.35,92.7 26.99,93.33 30.32,93.33 31.11,94.13 31.11,95.88 R33.2
DAC_MOSI  (via drill 0.38 pad 0.76)
  Top 0.203: UC1.28 19.18,86.96 17.78,85.57 7.62,85.57 6.99,84.93 v4.76,84.93 | v4.76,73.03 4.76,70.06 IC5.7
  Bottom 0.203: v4.76,84.93 5.4,84.3 5.4,73.66 v4.76,73.03
DAC_SCK  (via drill 0.38 pad 0.76)
  Top 0.203: UC1.26 18.18,87.08 17.15,86.04 7.14,86.04 6.83,85.72 v5.56,85.72 | v5.4,71.75 5.4,70.08 IC5.6
  Bottom 0.203: v5.56,85.72 5.56,84.93 5.87,84.61 5.87,72.23 v5.4,71.75
DAC_SS  (via drill 0.38 pad 0.76)
  Top 0.203: UC1.25 17.68,87.21 17.15,86.68 6.51,86.68 v6.35,86.84 | v6.19,70.8 6.19,70.16 IC5.5
  Bottom 0.203: v6.35,86.84 6.35,70.96 v6.19,70.8
DISP_CHAR0  (via drill 0.38 pad 0.76)
  Top 0.203: UC1.43 26.97,92.2 v27.3,92.54 | v27.94,103.49 18.1,103.49 17.62,103.97 A1.9
  Bottom 0.203: v27.3,92.54 27.78,92.54 28.41,93.18 28.41,103.02 v27.94,103.49
DISP_CHAR1  (via drill 0.38 pad 0.76)
  Top 0.203: UC1.45 25.9,93.2 26.51,93.81 27.3,93.81 v27.62,94.13 | v27.15,102.7 26.99,102.7 26.67,103.02 16.19,103.02 15.72,103.49 11.72,103.49 A1.6
  Bottom 0.203: v27.62,94.13 27.62,94.45 27.94,94.76 27.94,101.91 v27.15,102.7
DISP_CHAR2  (via drill 0.38 pad 0.76)
  Top 0.203: UC1.41 29.28,91.2 v29.37,91.11
  Bottom 0.203: v29.37,91.11 29.37,104.25 A1.14
DISP_CHAR3  (via drill 0.38 pad 0.76)
  Top 0.203: UC1.42 28.05,91.7 v28.26,91.91
  Bottom 0.203: v28.26,91.91 28.26,92.06 28.89,92.7 28.89,104.1 A1.13
DISP_EN  (via drill 0.38 pad 0.76)
  Top 0.203: UC1.21 16.18,90.67 19.18,90.67 v19.21,90.65
  Bottom 0.203: v19.21,90.65 19.37,90.65 24.92,85.09 24.92,83.03 A1.1
DISP_SCK  (via drill 0.38 pad 0.76)
  Top 0.203: UC1.22 18.38,90.2 v18.73,89.85
  Bottom 0.203: v18.73,89.85 19.53,89.85 23.5,85.88 23.5,83.5 A1.2
DISP_SER  (via drill 0.38 pad 0.76)
  Top 0.203: UC1.19 17.54,91.7 v17.84,91.41
  Bottom 0.203: v17.84,91.41 17.84,89.8 18.57,89.06 19.53,89.06 22.54,86.04 22.54,85.09 A1.3
ENC_A  (via drill 0.38 pad 0.76)
  Top 0.203: v22.37,94.17 22.37,94.66 22.15,94.88 22.15,96.18 UC1.3
  Bottom 0.203: SW1.B 17.31,72.75 16.22,73.83 16.22,83.79 16.52,84.08 16.52,92.99 18.49,94.97 21.57,94.97 v22.37,94.17
ENC_B  (via drill 0.38 pad 0.76)
  Top 0.203: v21.7,93.42 21.7,96.18 UC1.4
  Bottom 0.203: SW1.A 17.5,79.99 18.79,81.27 18.79,88.13 17.23,89.69 17.23,90.75 16.96,91.01 16.96,92.76 18.75,94.55 20.56,94.55 v21.7,93.42
ENC_CLICK  (via drill 0.38 pad 0.76)
  Top 0.203: UC1.2 22.68,95.57 22.92,95.33 v22.92,95.06 | v15.65,84.62 8.1,84.62 7.35,83.87 v1.83,83.87
  Bottom 0.203: v22.92,95.06 22.52,95.06 22.09,95.5 18.42,95.5 16.06,93.13 16.06,88.01 15.65,87.6 v15.65,84.62 | v1.83,83.87 1.83,73.92 SW1.E
FINE_TUNE  (via drill 0.38 pad 0.76)
  Top 0.203: UC1.13 11.47,94.7 | 11.47,94.7 | 11.47,94.7 10.55,94.7 C31.1 | v11.47,95.19 11.47,94.7
  Bottom 0.203: R19.2 10.01,38.42 10.68,39.09 10.68,51.32 11.32,51.96 11.32,67.16 12.77,68.61 12.77,82.04 10.77,84.04 10.77,94.49 v11.47,95.19
FM_CV  (via drill 0.38 pad 0.76)
  Top 0.203: IC7.7 34.47,59.52 v35.04,58.95 35.62,59.52 C17.2 | v35.04,60.78 36.22,60.78 R35.2 | v31.78,70.55 IC4.4
  Bottom 0.203: v35.04,58.95 v35.04,60.78 34.83,60.78 34.09,61.52 34.09,64.32 31.78,66.63 v31.78,70.55
GATE
  Top 0.203: R27.1 12.31,91.92 Q6.C 9.37,92.23 10.32,92.23 12.29,94.2 UC1.14
GND  (via drill 0.38 pad 0.76)
  Top 0.203: 7.62,43.56 7.62,42.23 8.58,41.27 8.58,40.75 C22.2 | IC7.3 31.17,57.63 C18.2 | v21.77,72.72 19.45,72.72 v19.28,72.89 | v22.25,75.95 19.32,75.95 v19.2,76.08 | v24.92,74.45 25.77,74.45 | 25.77,74.45 25.97,74.45 26.25,74.73 26.25,75.54 C12.2 | v26.16,74.29 25.77,74.45 | IC9.5 32.13,41.3 C23.2 | v31.62,39.64 31.62,40.08 C23.2 | v33.76,39.84 33.6,39.84 C23.2
  Top 0.508: IC8.1 7.62,43.56
  Top 0.762: v12.38,45.24 11.62,45.24 | v9.37,44.76 9.05,45.08 9.05,47.62
  other vias: 34.13,94.92 20.44,32.37 30.74,55.75 31.69,62.49 29.8,61.25 23.02,93 26.83,95.37 16.62,96.04 14.01,93.4 13.87,90.19 31.62,46.78 34.07,33.84 38.84,33.75 23,33.37 18.82,46.31 19.75,47.86 19.69,55.99 19.73,54.08 22.16,51.23 16.28,50.15 22.28,98.94 19.34,98.87 19.7,101.36 21.92,101.36 13.81,71.43 13.81,68.73 15.88,72.06 23.18,74.45 35.72,68.26 38.73,73.49 32.67,72.3 28.11,41.12 18.73,37.94 26.94,34.11 14.76,33.97 23.89,41.12
  pour Bottom (isolate 0.229): 0.52,2.56 0.57,2.01 0.75,1.54 1.04,1.13 1.43,0.81 1.89,0.6 2.42,0.52 37.9,0.52 38.43,0.6 38.89,0.81 39.28,1.13 39.58,1.54 39.75,2.01 39.8,2.56 39.8,105.38 39.73,106.13 39.5,106.81 39.13,107.42 38.63,107.94 38.03,108.34 37.36,108.59 36.63,108.7 3.67,108.7 2.93,108.64 2.26,108.42 1.66,108.05 1.17,107.56 0.8,106.96 0.58,106.29 0.52,105.55
  pour Top (isolate 0.254): 0.53,2.56 0.58,2.02 0.76,1.55 1.05,1.14 1.44,0.82 1.9,0.62 2.42,0.53 37.9,0.53 38.43,0.62 38.88,0.82 39.27,1.14 39.56,1.55 39.74,2.02 39.79,2.56 39.79,105.38 39.71,106.13 39.49,106.8 39.12,107.41 38.62,107.93 38.03,108.33 37.36,108.58 36.63,108.69 3.67,108.69 2.93,108.63 2.27,108.41 1.67,108.04 1.18,107.55 0.81,106.95 0.59,106.29 0.53,105.55
JTCK
  Top 0.203: UC1.37 31.58,89.2 33.18,90.81 JP2.4
JTDI  (via drill 0.38 pad 0.76)
  Top 0.203: UC1.38 31.28,89.7 33.02,91.44 v33.02,91.76 | v33.02,93.5 35.4,93.5 JP2.8
  Bottom 0.203: v33.02,91.76 v33.02,93.5
JTDO
  Top 0.203: UC1.39 30.35,90.2 32.7,92.55 34.13,92.55 34.61,92.08 JP2.6
JTMS  (via drill 0.38 pad 0.76)
  Top 0.203: UC1.34 22.18,86.33 22.75,85.76 35.16,85.76 v35.41,86.01
  Bottom 0.203: v35.41,86.01 35.41,89.39 JP2.2
N$1  (via drill 0.38 pad 0.76)
  Top 0.203: R2.2 33.23,14.92 R3.2 32.82,15.08 v32.16,15.74 | v31.11,24.29 U6.3
  Bottom 0.203: v32.16,15.74 32.16,19.16 31.51,19.81 31.51,23.89 v31.11,24.29
N$7
  Top 0.203: UC1.5 21.18,99.44 22.07,100.33 25.53,100.33 Q5.2 25.8,100.6 C9.2
N$8
  Top 0.203: UC1.6 20.68,99.34 19.69,100.33 16.19,100.33 Q5.1 15.92,100.6 C10.2
N$12  (via drill 0.38 pad 0.76)
  Top 0.203: IC9.7 33.43,43.76 34.09,43.76 | 34.09,43.76 36.03,43.76 R41.1 | R53.2 34.9,42.07 v33.98,41.14 | v34.09,43.86 34.09,43.76
  Bottom 0.203: v33.98,41.14 33.98,43.74 v34.09,43.86
N$13  (via drill 0.38 pad 0.76)
  Top 0.203: R39.1 27.11,56.51 26.53,57.09 14.24,57.09 v14.1,57.23 | v13.01,23.53 12.14,22.65 11.56,22.65 R20.2
  Bottom 0.203: v14.1,57.23 14.1,47.1 13.2,46.21 13.2,39.49 13.93,38.76 13.93,31.31 12.93,30.3 12.93,23.61 v13.01,23.53
N$19  (via drill 0.38 pad 0.76)
  Top 0.203: v32.7,82.54 R1.1 | U6.2 29.85,24.6 31.11,23.33 32.23,23.33 v32.54,23.65 | v31.27,71.75 32.07,71.75 32.54,71.27 33.65,71.27 v34.92,72.54
  Bottom 0.203: VR1.5 31.27,78.25 32.54,79.53 32.54,82.38 v32.7,82.54 34.92,80.32 v34.92,72.54 | v32.54,23.65 32.54,24.45 32.07,24.92 32.07,36.03 32.54,36.51 32.54,64.92 31.27,66.19 31.27,69.53 30.64,70.16 30.64,71.11 v31.27,71.75
N$29  (via drill 0.38 pad 0.76)
  Top 0.203: R34.1 v25.41,60.15 | C16.1 25.41,58.18 v25.45,58.18 25.54,58.18 25.66,58.06 29.28,58.06 v29.01,57.8 29.28,58.07 30.34,58.07 30.55,58.27 30.55,59.49 IC7.2 | v25.61,55.25 25.61,55.95 R39.2 | R41.2 38.1,44.45 37.59,44.96 35.58,44.96 35.35,45.19 33.16,45.19 32.9,45.44 v30.74,45.44
  Bottom 0.203: v25.41,60.15 25.45,60.15 v25.45,58.18 25.66,58.18 25.66,55.3 v25.61,55.25 | v30.74,45.44 30.74,54.26 29.48,55.53 29.48,57.33 v29.01,57.8
N$45
  Top 0.203: IC9.6 32.78,42.12 33.05,41.86 33.87,41.86 35.05,43.04 37.13,43.04 R53.1 R54.2
N$48  (via drill 0.38 pad 0.76)
  Top 0.203: R24.2 7.72,15.11 v7.24,15.6
  Bottom 0.203: v7.24,15.6 7.24,18.89 6.07,20.06 6.07,22.96 8.33,25.22 8.33,35.82 8.75,36.23 8.75,37.79 10.16,39.2 10.16,53.4 R21.2
N$49
  Top 0.508: C19.+ 10,63.17 10.79,63.96 12.47,63.96 13.03,64.51 13.03,65.21 14.02,65.21 IC6.3 14.14,65.21 15.34,65.21 15.88,64.67 15.88,63.97 17.62,62.23 R49.1
N$50  (via drill 0.38 pad 0.76)
  Top 0.203: IC9.13 30.18,47.78 29.86,47.46 26.55,47.46 v26.07,47.94 25.63,48.38 25.63,48.83 R43.1
  Bottom 0.203: R37.3 27.83,21.24 28.57,21.98 28.57,33.85 28.04,34.39 28.04,38.61 26.81,39.84 26.81,47.2 v26.07,47.94
N$51  (via drill 0.38 pad 0.76)
  Top 0.203: IC9.14 v28.52,49 27.16,49 R43.2 | v28.52,51.42 27.26,51.42 R30.1
  Bottom 0.203: v28.52,49 v28.52,51.42
N$52  (via drill 0.38 pad 0.76)
  Top 0.203: IC9.2 30.18,44.35 29.13,45.4 26.04,45.4 25.72,45.08 25.72,44.76 25.44,44.76 R52.1 23.05,44.48 22.23,43.66 17.16,43.66 15.41,41.91 v8.89,41.91
  Bottom 0.203: v8.89,41.91 8.89,42.54 8.42,43.02 8.42,51.14 7.52,52.03 R21.3
N$53
  Top 0.203: IC9.1 29.53,43.17 27.3,43.17 | 27.3,43.17 27.3,44.32 R52.2 | R42.1 27.3,42.7 27.3,43.17
N$55  (via drill 0.38 pad 0.76)
  Top 0.203: R21.1 23.46,53.26 v23.79,52.93 24.16,52.93 24.55,52.55 v34.66,52.55 | v24.76,42.7 24.76,42.86 25.6,42.86 R42.2 | v35.13,56.11 36.32,56.11 R40.2 | v37.64,57.91 37.64,58.28 C17.1 | R35.1 37.6,61.46 v37.6,61.76 33.94,61.76 33.1,60.93 33.1,59.53 IC7.6
  Bottom 0.203: v23.79,52.93 23.79,43.68 v24.76,42.7 | v34.66,52.55 34.66,55.64 v35.13,56.11 35.84,56.11 v37.64,57.91 37.64,61.72 v37.6,61.76
N$56  (via drill 0.38 pad 0.76)
  Top 0.203: JP1.2 JP1.1 | v18.49,32.55 18.49,34.21 D3.4
  Bottom 0.203: JP1.2 17.84,19.68 17.15,20.38 17.15,31.21 v18.49,32.55
N$58  (via drill 0.38 pad 0.76)
  Top 0.203: IC9.8 v35.09,49 | v35.09,49 36.3,49 R44.2 35.19,48.9 v35.09,49 | v35.04,51.2 36.32,51.2 R31.1
  Bottom 0.203: v35.09,49 35.09,51.15 v35.04,51.2
N$59  (via drill 0.38 pad 0.76)
  Top 0.203: R30.2 v24.81,51.28 | v24.73,53.76 25.35,53.76 R28.2 | v24.73,62.97 24.88,62.97 C13.1 | v25.13,64.83 25.13,65.29 | 25.13,65.29 25.13,65.65 25.32,65.65 R25.1 | 25.13,65.29 25.89,64.54 28.74,64.54 28.95,64.32 28.95,63.93 29.27,63.61 30.04,63.61 30.52,64.09 IC7.13 | v27.78,22.86 32.17,22.86 32.63,22.4 32.63,21.26 R37.1
  Bottom 0.203: v25.13,64.83 24.73,64.43 v24.73,62.97 v24.73,53.76 24.81,53.69 v24.81,51.28 24.81,46.43 25.72,45.52 25.72,37.95 25.51,37.74 25.51,31.75 27.88,29.38 27.88,22.96 v27.78,22.86
N$61  (via drill 0.38 pad 0.76)
  Top 0.203: v37.78,54.92 28.21,54.92 R28.1
  Bottom 0.203: VR1.2 38.89,38.89 37.62,40.16 37.62,54.76 v37.78,54.92
N$62  (via drill 0.38 pad 0.76)
  Top 0.203: R48.2 30.37,17.94 v30.29,17.86
  Bottom 0.203: v30.29,17.86 30.29,21.05 R37.2
N$63  (via drill 0.38 pad 0.76)
  Top 0.203: IC9.9 32.78,47.87 33.17,47.48 37.14,47.48 R47.2 38.81,46.51 v38.85,46.48 | v38.85,48.86 38.13,48.86 R44.1
  Bottom 0.203: v38.85,46.48 v38.85,48.86
N$64
  Top 0.203: JP1.9 JP1.10 18.2,29.84 15.99,32.05 15.99,34.26 D3.3
  Bottom 0.203: JP1.9 JP1.10
N$65  (via drill 0.38 pad 0.76)
  Top 0.203: v29.37,53.65 R32.1
  Bottom 0.203: VR2.2 v29.37,53.65
N$66
  Top 0.203: R29.2 8.4,89.38 Q6.B
N$67  (via drill 0.38 pad 0.76)
  Top 0.203: IC10.6 IC10.7 2.87,41.37 v3.24,41.73 | v2.53,48.28 1.79,48.28 C21.2 | C24.+ 9.83,32.45 9.31,32.45 9.29,32.46 8.78,32.46 7.85,31.54 v4.36,31.54
  Bottom 0.203: v2.53,48.28 2.35,48.11 2.35,42.62 v3.24,41.73 3.06,41.55 3.22,41.55 4.36,40.41 v4.36,31.54
N$68  (via drill 0.38 pad 0.76)
  Top 0.203: R50.2 9.9,26.02 v9.87,26.05 | v9.89,28.11 9.89,29.54 C24.-
  Bottom 0.203: v9.87,26.05 9.87,28.13 v9.89,28.11
N$69  (via drill 0.38 pad 0.76)
  Top 0.203: C22.1 6.44,40.09 IC10.5 4.17,41.47 v4.41,41.71 | v3.91,47.39 3.91,47.7 R46.1
  Bottom 0.203: v4.41,41.71 4.41,41.8 3.16,43.06 3.16,46.63 v3.91,47.39
N$70  (via drill 0.38 pad 0.76)
  Top 0.203: R31.2 38.62,51.12 v38.71,51.03 | C14.1 38.14,65.77 v38.74,65.77 37.84,64.86 34.96,64.86 34.03,63.93 33.52,63.93 33.12,64.33 IC7.9 | R26.1 38.54,63.34 v38.68,63.2 | R32.2 38.73,53.66 v38.76,53.63
  Bottom 0.203: v38.71,51.03 38.71,53.63 | 38.71,53.63 38.71,63.2 | 38.71,63.2 38.74,63.2 v38.74,65.77 | v38.68,63.2 38.71,63.2 | v38.76,53.63 38.71,53.63
N$71  (via drill 0.38 pad 0.76)
  Top 0.203: R46.2 v3.1,50.01 3.1,50.12 1.83,50.12 C21.1 | v2.73,56.12 1.99,56.12 R45.1
  Bottom 0.203: v3.1,50.01 3.1,55.74 v2.73,56.12
N$72  (via drill 0.38 pad 0.76)
  Top 0.203: J6.2 12.08,4.97 10.85,6.19 5.74,6.19 v5.07,6.87 | v4.14,21.65 4.14,22.23 R55.1 R56.1 | R56.1
  Bottom 0.203: v5.07,6.87 5.07,9.74 5.7,10.37 5.7,18.19 4.64,19.24 4.64,21.14 v4.14,21.65
N$73  (via drill 0.38 pad 0.76)
  Top 0.203: R55.2 5.2,24.4 v5.4,24.6 | v2.48,30.23 2.48,29.15 C29.2 | v2.09,32.88 2.09,34.16 IC10.1
  Bottom 0.203: v5.4,24.6 3.91,24.6 2.41,26.11 2.41,30.15 v2.48,30.23 2.48,32.48 v2.09,32.88
N$75  (via drill 0.38 pad 0.76)
  Top 0.203: R56.2 2.38,25.22 2.83,25.66 3.8,25.66 | 3.8,25.66 7.67,25.66 R50.1 | C29.1 2.87,27.41 v3.5,26.77 3.5,25.96 3.8,25.66 | v3.23,32.23 3.23,32.55 2.89,32.88 2.89,34.27 IC10.2
  Bottom 0.203: v3.5,26.77 3.5,27.11 3.05,27.56 3.05,29.55 3.5,30 3.5,31.95 v3.23,32.23
Net_0  (via drill 0.38 pad 0.76)
  Top 0.203: J9.2 36.84,4.6 34.49,6.96 6.8,6.96 v6.43,7.33 | v7.15,88.15 3.86,88.15 3.6,88.41 3.6,89.33 R29.1
  Bottom 0.203: v6.43,7.33 6.43,18.94 5.55,19.82 5.55,23.35 7.59,25.39 7.59,34.41 5.96,36.04 5.96,40.13 7.15,41.32 7.15,50.24 5.32,52.06 5.32,55.29 7.49,57.46 7.49,87.81 v7.15,88.15
Net_1  (via drill 0.38 pad 0.76)
  Top 0.203: J3.2 24.94,5.71 25.66,6.43 33.13,6.43 v35.5,4.06 | v35.53,40.38 R54.1
  Bottom 0.203: v35.5,4.06 35.5,17.36 37.64,19.5 37.64,38.61 36.59,39.66 36.24,39.66 v35.53,40.38
Net_2
  Top 0.203: J5.2 36.2,13.97 R3.1 R48.1
Net_3  (via drill 0.38 pad 0.76)
  Top 0.203: U6.7 29.85,32.54 v30,32.7 | v30,34.76 28.1,34.76 27.15,35.72 23.49,35.72 22.54,36.67 22.54,37.14 VR2.6
  Bottom 0.203: v30,32.7 v30,34.76
Net_12  (via drill 0.38 pad 0.76)
  Top 0.203: U6.1 28.58,24.44 v29.37,23.65
  Bottom 0.203: v29.37,23.65 29.37,23.81 31.27,25.71 VR1.6
Net_42
  Top 0.203: J1.2 10.32,13.97 R24.1
Net_55  (via drill 0.38 pad 0.76)
  Top 0.203: R6.1 23.64,13.97 J10.2 24.94,14.99 25.85,15.91 28.21,15.91 29.05,16.74 33.41,16.74 v33.74,16.41 | v35.15,46.48 36.36,46.48 R47.1
  Bottom 0.203: v33.74,16.41 33.74,16.61 37.08,19.95 37.08,33.1 35.07,35.11 35.07,38.92 34.7,39.3 34.7,41.24 35.15,41.69 v35.15,46.48
Net_80  (via drill 0.38 pad 0.76)
  Top 0.203: 30.87,31.18 31.05,31.18 U6.6 31.43,31.43 31.43,31.59 30.96,32.06 30.96,33.33 30.48,33.81 28.26,33.81 27.15,34.92 22.23,34.92 21.91,35.24 v21.27,35.24 | R4.1 23.49,79.68 VR2.5
  Bottom 0.203: VR2.5 21.75,76.83 21.43,76.51 21.43,73.65 20.96,73.18 20.96,39.84 20.32,39.21 20.32,36.19 v21.27,35.24
Net_81  (via drill 0.38 pad 0.76)
  Top 0.203: R6.2 20.43,15.37 R5.2 20.32,13.95 22.71,13.95 25.44,16.68 27.65,16.68 30.06,19.09 33.84,19.09 v34.67,19.93 | v33.2,31.84 33.11,31.84 U6.5
  Bottom 0.203: v34.67,19.93 34.67,23.47 32.63,25.52 32.63,31.26 v33.2,31.84
Net_106  (via drill 0.38 pad 0.76)
  Top 0.203: L2.2 18.61,51.59 v18.75,51.73 | v18.84,58.87 18.84,59.64 L4.1 | D3.1 18.31,40.01 v17.63,40.68
  Bottom 0.203: v18.84,58.87 18.75,58.77 v18.75,51.73 17.63,50.61 v17.63,40.68
Net_107
  Top 0.203: D3.2 16.03,41.59 16.55,42.11 19.88,42.11 L1.2
Net_110  (via drill 0.38 pad 0.76)
  Top 0.203: L4.2 v21.79,59.69 | v22.32,61.06 22.22,61.06 22.22,61.11 R49.2
  Bottom 0.203: v21.79,59.69 21.79,60.53 v22.32,61.06
PARAM1_CV  (via drill 0.38 pad 0.76)
  Top 0.203: IC7.14 v27.98,65.32 27.36,65.32 R25.2 | v27.98,63.09 27.52,63.09 C13.2 | v28.26,67.4 29.07,67.4 29.79,68.12 29.79,69.16 IC4.1
  Bottom 0.203: v27.98,63.09 v27.98,65.32 28.26,65.32 v28.26,67.4
PARAM2_CV  (via drill 0.38 pad 0.76)
  Top 0.203: IC7.8 33.77,65.64 35.06,65.64 | 35.06,65.64 36.31,65.64 C14.2 | R26.2 v35.4,63.34 | v35.06,65.75 35.06,65.64 | v33.58,67.22 31.12,67.22 30.51,67.84 30.51,69.2 IC4.2
  Bottom 0.203: v35.4,63.34 35.4,65.41 v35.06,65.75 v33.58,67.22
PITCH_CV  (via drill 0.38 pad 0.76)
  Top 0.203: IC7.1 29.87,59.17 v27.93,59.17 27.86,59.24 27.45,59.24 C16.2 | v28.06,61.28 27.43,61.28 R34.2 | v28.91,70.85 30.64,70.85 31.09,70.4 31.09,69.27 IC4.3
  Bottom 0.203: v27.93,59.17 27.93,61.15 v28.06,61.28 28.21,61.28 29.53,62.6 29.53,70.24 v28.91,70.85
RESET  (via drill 0.38 pad 0.76)
  Top 0.203: JP2.10 35.56,96.36 R22.1 34.42,97.5 v22.22,97.5 | UC1.7 20.18,97.36 v19.99,97.55
  Bottom 0.203: v19.99,97.55 22.27,97.55 v22.22,97.5
VCC  (via drill 0.38 pad 0.76)
  Top 0.381: IC9.4 31.48,41.71 30.74,40.96 C23.1 30.27,40.95 29.08,39.76 21.09,39.76 19.85,38.52 19.85,37.54 19.08,36.77 | v14.78,52.36 14.84,52.43 14.84,51.59 L2.1 v1.48,51.59 | v17.35,56.43 17.35,55.04 C25.+ | C28.1 1.93,42.51 v1.93,41.54 1.93,40.39 IC10.8 2.17,40.04 2.17,38.85 2.65,38.38 5.08,38.38 5.51,38.8 12.86,38.8 14.9,36.77 19.08,36.77 | U6.8 28.42,31.12 26.88,32.65 26.14,32.65 C3.2 26.09,33.87 25.69,34.27 20.74,34.27 20.04,34.96 20.04,35.81 19.08,36.77
  Bottom 0.381: v14.78,52.36 14.78,53.86 v17.35,56.43 | v1.48,51.59 1.48,41.99 v1.93,41.54
VEE  (via drill 0.38 pad 0.76)
  Top 0.381: C20.2 32.28,51.63 32.29,51.63 31.48,50.83 IC9.11 31.48,47.88 30.6,46.99 23.22,46.99 C30.- 22.29,47.92 v22.29,48.94 22.29,49.08 22.02,49.35 v15.27,49.35 13.57,49.35 R51.1 | L1.1 22.4,42.28 v22.35,42.34 | C1.1 34.12,23.82 34.12,24.31 32.72,25.72 U6.4 32.39,27.15 30.91,28.63 28.93,28.63 26.43,31.13 18.4,31.13 17.28,32.25 17.28,35.51 16.85,35.94 v16.71,35.94 14.63,35.94 14.23,35.55 5.43,35.55 IC10.4 6.67,34.29 C27.2
  Bottom 0.381: v22.35,42.34 22.35,48.89 v22.29,48.94 | v15.27,49.35 15.27,48.62 16.8,47.1 16.8,36.03 v16.71,35.94

## Text on the board
Top: JM
tPlace: uBraids II | all | + | all | EITHER WAY | Original braids by Olivier Gillet | CC-BY-SA-3.0 | ! | !
bPlace: Jak | Plugg | CC-BY-SA-3.0 | !!